# Altium PCB 采集卡.PcbDoc (part 1 of 2)
Units mil, origin at the board's own origin, x right, y up, seen from the top; angles counter-clockwise.
Board outline 5354.33 x 3248.82 mil, 2 copper layers (Top Layer, Bottom Layer); 147 components, 144 nets, 645 pads, 170 vias.
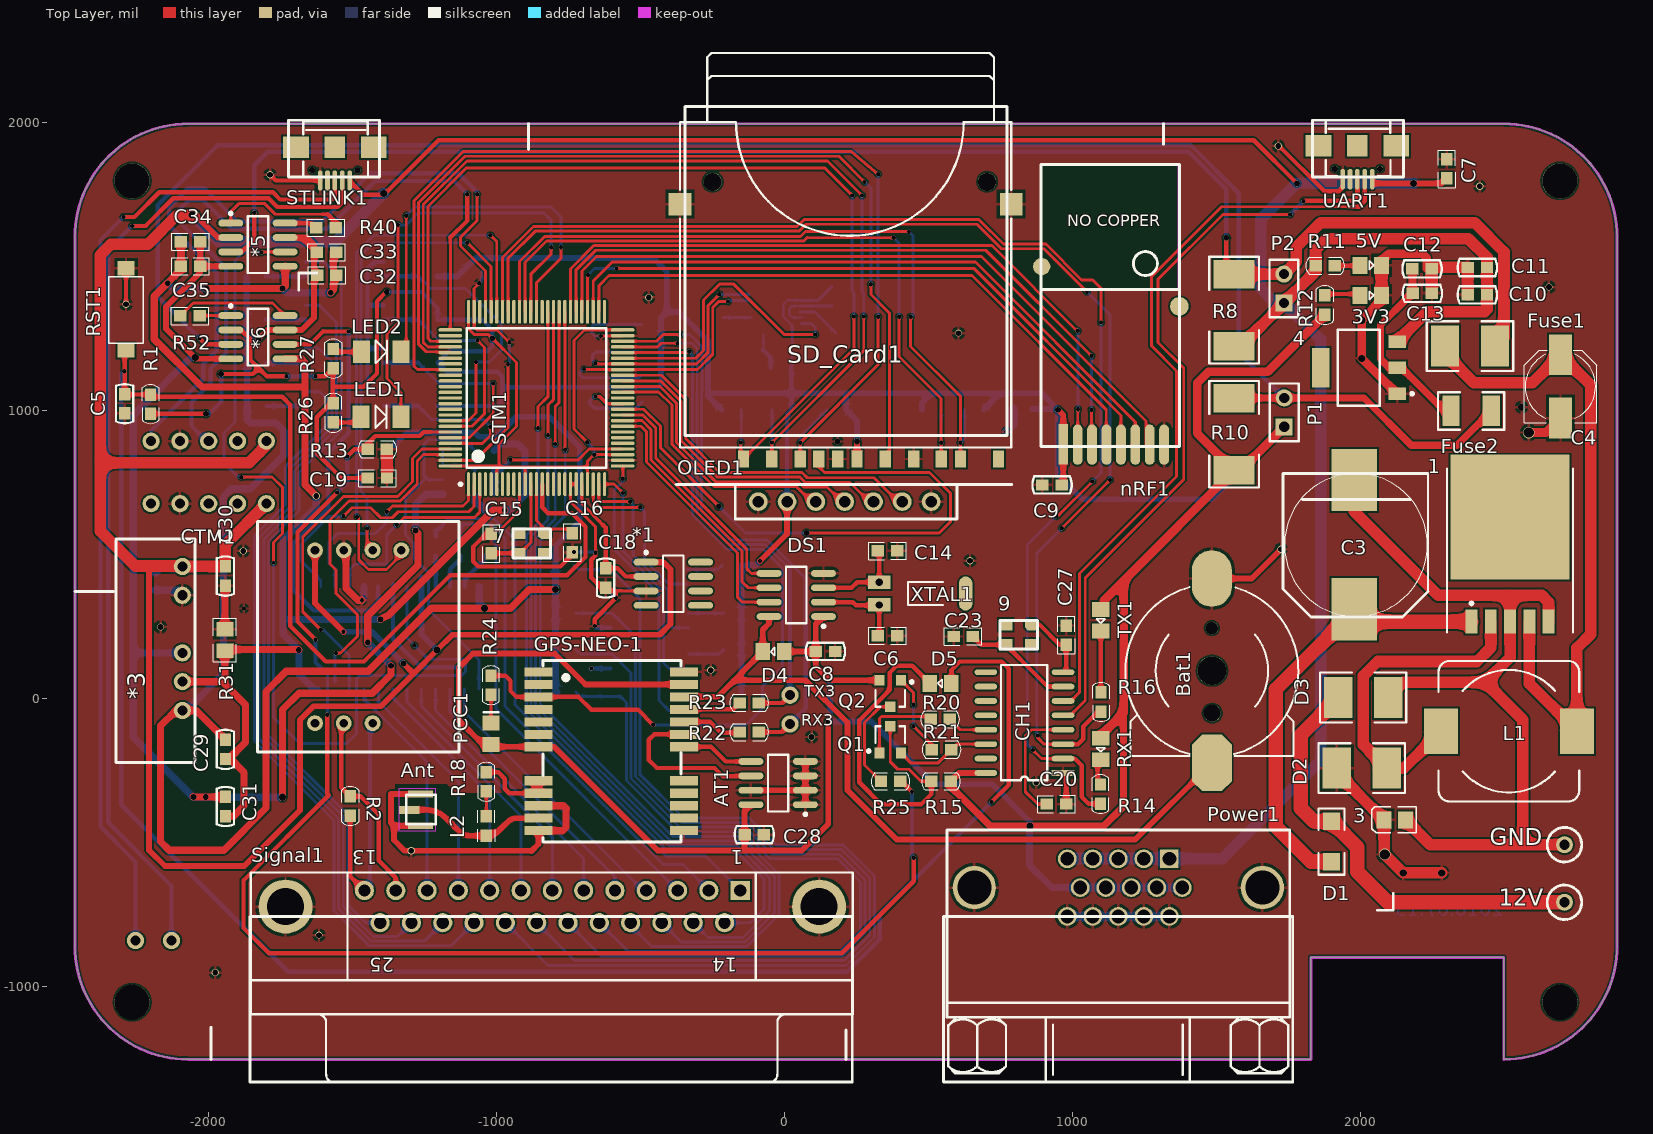
[diagram p0: Top Layer view]
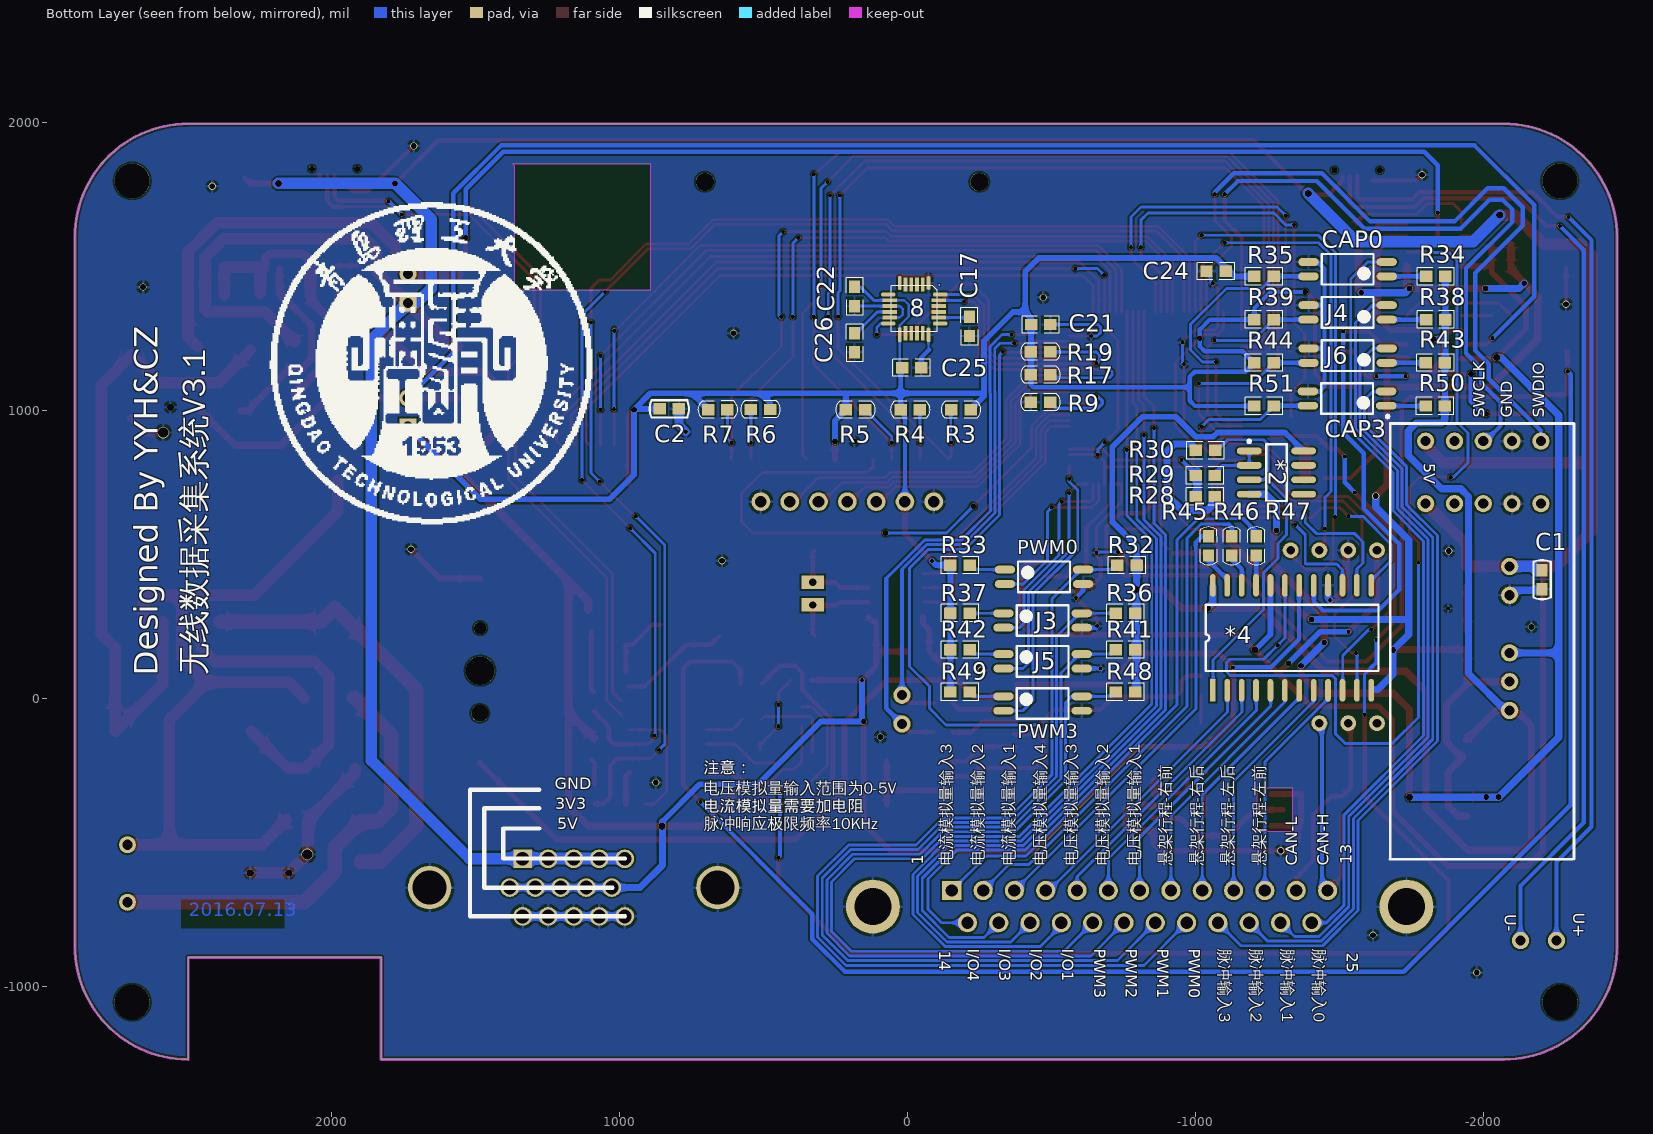
[diagram p1: Bottom Layer view, seen from below]

## Layer stack, top to bottom
Top Solder: solder mask 0.4, Solder Resist, Dk 3.5
Top Layer: signal copper 1.4
Dielectric1: dielectric 12.6, FR-4, Dk 4.8
Bottom Layer: signal copper 1.4
Bottom Solder: solder mask 0.4, Solder Resist, Dk 3.5

## Board outline
-2462.61,-860.95 ccw(c-2068.91,-860.95) -2068.91,-1254.65 1828.73,-1254.65 1828.73,-900.32 2498.02,-900.32 2498.02,-1254.65 ccw(c2498.02,-860.95) 2891.72,-860.95 2891.72,1600.47 ccw(c2498.02,1600.47) 2498.02,1994.17 -2068.91,1994.17 ccw(c-2068.91,1600.47) -2462.61,1600.47

## Design rules (kind name [scope] priority, off if disabled: settings)
Clearance [All] p1: gap=6
ComponentClearance [All] p1: gap=0 collisioncheckmode=3 verticalgap=0 showdistances=FALSE
MinimumSolderMaskSliver [All] p1: minsoldermaskwidth=7
PolygonConnect [All] p1: connectstyle=Relief reliefconductorwidth=10 reliefentries=4 polygonreliefangle="90 Angle" airgapwidth=10
RoutingVias [All] p1: holewidth=28 width=50 viastyle="Through Hole" minholewidth=28 minwidth=25 maxholewidth=28 maxwidth=50
SilkToSolderMaskClearance SilkscreenOverComponentPads [IsPad] p1: minsilkscreentomaskgap=10 clearancetoexposedcopper=TRUE
SolderMaskExpansion [All] p1: expansion=4
Width [All] p1: maxlimit=80 minlimit=8 preferedwidth=15
27 further rules are at their usual default settings.

## Components (designator, comment, footprint, x,y, rotation, side; value= is the part's Value field where it differs from the comment)
1 "LM2596S-5.0" TO-263-5 2520,432 r0 top
3 "0" 0805-3 2120,-423 r180 top
3V3 "LED0" 0805-2 2036.6,1398 r0 top (schematic designator 6)
4 "AMS1117" 1117-3.3 2000,1147 r90 top
5V "LED0" 0805-2 2036.6,1502.59 r0 top (schematic designator 5)
7 "XTAL-4pin" 3225-XTAL -811,487 r180 top
8 "MPU6050" QFN24 -102,1436 r270 bottom
9 "XTAL-4pin" 3225-XTAL 879,170 r180 top
12V "CHECK" CHECK-A 2709,-709 r0 top (schematic designator 2)
*1 "MC1403" SOIC8_N -435,407 r0 top
*2 "NE5532" SOIC8_N -1230,793 r180 bottom
*3 "A0505S" A0505S-2W -2275,457 r180 top
*4 "CD4067" SOP24 -1059,32 r90 bottom
*5 "AD623" SOIC8_N -1877,1584 r0 top
*6 "AD623" SOIC8_N -1877,1263 r0 top
Ant "IPX接头" IPX2.6 -1312,-438 r90 top (schematic designator Antenna1)
AT1 "AT24C02" SOIC8_N 29,-305 r180 top
Bat1 "Battery" CR1220 1485,95 r0 top
C1 "Cap" C-RAD-0603 -2202,411 r270 bottom
C2 "Cap" C-RAD-0603 828,1003.94 r180 bottom
C3 "680uF/35V" C-RB-S12 1985,532 r90 top
C4 "220uF/16V" C-RB-S6 2695,1082 r270 top
C5 "Cap" C-RAD-0603 -2290,1022 r270 top
C6 "6pf" CL-0603 392,217 r180 top
C7 "Cap" CL-0603 2300,1804 r90 top
C8 "Cap" C-RAD-0603 143,161.94 r180 top
C9 "Cap" C-RAD-0603 930,740 r0 top
C10 "Cap" C-RAD-0603 2406.54,1400 r0 top
C11 "Cap" C-RAD-0603 2406.54,1495 r0 top
C12 "Cap" C-RAD-0603 2214.54,1490 r180 top
C13 "Cap" C-RAD-0603 2215.54,1405 r0 top
C14 "6pf" CL-0603 392,511 r180 top
C15 "22pf" CL-0603 -1017,570 r270 top
C16 "22pf" CL-0603 -736,506 r90 top
C17 "Cap" CL-0603 -214,1324 r270 bottom
C18 "Cap" C-RAD-0603 -620,417 r90 top
C19 "104" CL-0603 -1379,764 r180 top
C20 "104" CL-0603 912,-368 r0 top
C21 "104" CL-0603 -495,1297 r0 bottom
C22 "Cap" CL-0603 185,1428 r270 bottom
C23 "Cap" CL-0603 655,214 r180 top
C24 "104" CL-0603 -1037,1482 r180 bottom
C25 "Cap" CL-0603 20,1147 r180 bottom
C26 "Cap" CL-0603 185,1267 r270 bottom
C27 "Cap" CL-0603 979,185 r90 top
C28 "Cap" C-RAD-0603 -104,-474 r0 top
C29 "Cap" C-RAD-0603 -1940,-178 r90 top
C30 "Cap" C-RAD-0603 -1940,423.54 r90 top
C31 "Cap" C-RAD-0603 -1940,-376.46 r270 top
C32 "Cap" 0603-1 -1588,1468 r180 top
C33 "Cap" 0603-1 -1589,1548 r180 top
C34 "Cap" 0603-1 -2061,1584 r0 top
C35 "Cap" 0603-1 -2061,1499 r0 top
CAP0 "TLP281" SOP127P710X350-4N -1527,1489 r0 bottom (schematic designator J2)
CAP3 "TLP281" SOP127P710X350-4N -1525,1040 r0 bottom (schematic designator J8)
CH1 "CH340G" SOP16 968,-260 r180 top
CTM1 "CTM8251" CTM8251 -1629,513 r270 top
D1 "1N4007" 1206 1900,-498 r270 top
D2 "1N5824" 1812 2005,-243 r0 top
D3 "双向TVS" 1812 2010,2 r180 top
D4 "1n4148" 0805-2 -37,161.53 r180 top
D5 "1n4148" 0805-2 543,51 r180 top
DS1 "DS1302" SOIC8_N 92,348 r180 top
Fuse1 "自恢复保险丝" 1812 2381,1222 r0 top
Fuse2 "自恢复保险丝" 1210 2385,997 r0 top
GND "CHECK" CHECK-A 2709,-509 r0 top (schematic designator GND1)
GPS-NEO-1 "NEO-6M" NEO-6M -838,-169 r90 top
J3 "TLP281" SOP127P710X350-4N -468,269.33 r180 bottom
J4 "TLP281" SOP127P710X350-4N -1527,1339 r0 bottom
J5 "TLP281" SOP127P710X350-4N -468,127.67 r180 bottom
J6 "TLP281" SOP127P710X350-4N -1527,1189 r0 bottom
L1 "Inductor" L-SMD-12 2516,-115 r0 top
L2 "Inductor" 0603电感 -1034,-444 r270 top
LED1 "LED0" DIODE-1206 -1468.8,977 r0 top
LED2 "LED0" DIODE-1206 -1467.8,1202 r0 top
nRF1 "nRF24l01贴片" NRF24L01贴片 1372,1853 r90 top
OLED1 "OLED-Freescale" OLED-FREESCALE 210,682 r0 top
P1 "Header 2" HDR2X1_A 1736,942 r90 top
P2 "Header 2" HDR2X1_A 1735,1372 r90 top
PCC1 "LED0" LED_0805 -1018,-124 r90 top
Power1 "Power" DB15-F 1160,-758 r270 top
PWM0 "TLP281" SOP127P710X350-4N -473,421 r180 bottom (schematic designator J1)
PWM3 "TLP281" SOP127P710X350-4N -468,-19 r180 bottom (schematic designator J7)
Q1 "SS8050" SOT-23 368,-144 r0 top
Q2 "SS8550" SOT-23 368,16 r180 top
R1 "Res2" 8-RL-0603 -2200,987 r90 top
R2 "Res2" 8-RL-0603 -1507,-341 r270 top
R3 "Res2" 8-RL-0603 -218,1001.5 r0 bottom
R4 "Res2" 8-RL-0603 25,1001 r180 bottom
R5 "Res2" 8-RL-0603 215,1001 r180 bottom
R6 "Res2" 8-RL-0603 478,1002 r0 bottom
R7 "Res2" 8-RL-0603 693,1001.5 r180 bottom
R8 "Res1" 2512 1562,1347 r270 top
R9 "10K" 8-RL-0603 -427.22,1027 r180 bottom
R10 "Res1" 2512 1562,916 r270 top
R11 "Res2" 8-RL-0603 1911.6,1501.06 r180 top
R12 "Res2" 8-RL-0603 1877,1398 r270 top
R13 "10K" 8-RL-0603 -1379.07,864 r180 top
R14 "472" 8-RL-0603 1098,-366.93 r90 top
R15 "10K" 8-RL-0603 578,-289 r180 top
R16 "472" 8-RL-0603 1100,-46.93 r90 top
R17 "10K" 8-RL-0603 -427.22,1122 r180 bottom
R18 "10" 8-RL-0603 -1034,-324 r90 top
R19 "10K" 8-RL-0603 -427.22,1202 r180 bottom
R20 "Res1" 8-RL-0603 508,-74 r0 top
R21 "Res1" 8-RL-0603 513,-179 r0 top
R22 "51R" 8-RL-0603 -155,-118 r0 top
R23 "51R" 8-RL-0603 -155,-17 r0 top
R24 "1K" 8-RL-0603 -1018,11 r90 top
R25 "Res1" 8-RL-0603 403,-289 r180 top
R26 "Res2" 8-RL-0603 -1565.8,957 r90 top
R27 "Res2" 8-RL-0603 -1565.8,1212 r270 top
R28 "0.1%" 0603-1 -1032.54,700 r180 bottom
R29 "0.1%" 0603-1 -1032.54,773 r0 bottom
R30 "Res1" 0603-1 -1033.54,860 r180 bottom
R31 "Res1" 0805-1 -1941.97,202 r270 top
R32 "Res1" 0603-1 -761,461.28 r0 bottom
R33 "Res1" 0603-1 -181.54,461.28 r180 bottom
R34 "Res1" 0603-1 -1833,1464 r0 bottom
R35 "Res1" 0603-1 -1237,1464 r180 bottom
R36 "Res1" 0603-1 -756,295 r0 bottom
R37 "Res1" 0603-1 -181.54,295 r180 bottom
R38 "Res1" 0603-1 -1833,1314 r0 bottom
R39 "Res1" 0603-1 -1237,1314 r180 bottom
R40 "Res1" 0603-1 -1591,1633 r180 top
R41 "Res1" 0603-1 -756,167.94 r0 bottom
R42 "Res1" 0603-1 -181.54,167.94 r180 bottom
R43 "Res1" 0603-1 -1831.54,1164 r0 bottom
R44 "Res1" 0603-1 -1237,1164 r180 bottom
R45 "Res1" 8-RL-0603 -1044,562 r270 bottom
R46 "Res1" 8-RL-0603 -1125,562 r270 bottom
R47 "Res1" 8-RL-0603 -1210,562 r270 bottom
R48 "Res1" 0603-1 -756,21.28 r0 bottom
R49 "Res1" 0603-1 -181.54,21.28 r180 bottom
R50 "Res1" 0603-1 -1831,1014 r0 bottom
R51 "Res1" 0603-1 -1237,1014 r180 bottom
R52 "Res1" 0603-1 -2063,1327 r180 top
RST1 "复位" 6X3MM微动 -2285,1492 r270 top
RX1 "LED0" 0805-2 1099,-176.93 r270 top
SD_Card1 "SDCARD" SDCARD_B 228,865 r90 top
Signal1 "信号" DSUB1.385-2H25A -805,-1098 r180 top
STLINK1 "USB_M" USB_MICRO -1460,1862 r180 top
STM1 "STM32F103VBT6" LQFP100_M -860,1042 r90 top
TX1 "LED0" 0805-2 1099,270 r270 top
UART1 "USB_M" USB_MICRO 2090,1867 r180 top
XTAL1 "32.768K" X-TC15 330,363 r90 top
? "Comment" QTU30mm 1320,1440 r180 top

## Footprints (in the part's own frame and the unit in brackets; to place one, negate y for a bottom-side part, rotate by r counter-clockwise, add the part's x,y. Pads: shape width x height; smd on the part's side, far side on the other; paste and mask are expansions set on the pad)
6X3MM微动 [mil]
  rect 50x60 smd: 1(0,0) 2(285,0)
  silkscreen extent 30,-60 260,60
8-RL-0603 [mm]
  rect 1.1x1 smd: 1(0,0) 2(1.7,0)
  silkscreen extent -0.86,-0.75 2.56,0.76
0603-1 [mm] "贴片带丝印"
  rect 1.1x1 smd: 1(-0.85,0) 2(0.85,0)
  silkscreen extent -1.65,-0.76 1.65,0.76, body extent -1.14,-0.38 1.14,0.38, height 1
0603电感 [mm]
  rect 1.1x1 smd: 1(-0.839,0) 2(0.861,0)
  silkscreen extent -1.39,-0.75 1.41,0.76, body extent -1.4,-0.51 1.4,0.51, height 1.02
0805-1 [mm] "贴片带丝印"
  rect 1.3x1.5 smd: 1(-0.95,0) 2(0.95,0)
  silkscreen extent -1.91,-1.02 1.91,1.02, body extent -1.14,-0.51 1.14,0.51, height 1
0805-2 [mm] "贴片无丝印"
  rect 1.3x1.5 smd: 1(-0.95,0) 2(0.95,0)
  silkscreen extent -0.13,-0.38 0.25,0.38, body extent -1.65,-0.76 1.65,0.76, height 1.02
0805-3 [mm] "贴片无丝印"
  rect 1.3x1.5 smd: 1(-0.95,0) 2(0.95,0)
  silkscreen extent -1.91,-1.14 2.03,1.14, body extent -1.65,-0.76 1.65,0.76, height 1.02
1117-3.3 [mm]
  rect 1.1x1.55 smd: 1(-2.3,-3.248) 2(0,-3.248) 3(2.3,-3.248)
  rect 3.45x1.55 smd: 4(0,3.502)
  silkscreen extent -3.35,-4.7 3.35,1.98, body extent -3.3,-1.65 3.3,1.91, height 1.8
1206 [mil] "贴片元件"
  rect 60x60 smd: 1(-70,0) 2(70,0)
  silkscreen extent -115,-45 115,45, body extent -75,-35 75,35, height 39
1210 [mil] "贴片元件"
  rect 60x106.3 smd: 1(-70,0) 2(70,0)
  silkscreen extent -115,-65 115,65, body extent -65,-50 65,50, height 39
1812 [mm] "保险丝"
  rect 2.5x3.6 smd: 1(-2.2,0) 2(2.2,0)
  silkscreen extent -3.81,-2.2 3.81,2.2, body extent -2.54,-1.65 2.67,1.65, height 1.2
2512 [mm] "保险丝"
  rect 2.5x3.6 smd: 1(-3.175,0) 2(3.175,0)
  silkscreen extent -4.7,-2.2 4.7,2.2, body extent -3.18,-1.65 3.18,1.65, height 1.2
3225-XTAL [mil]
  oct 47.24x39.37 smd: 1(20,-85)
  rect 47.24x39.37 smd: 2(110,-85) 3(110,-15) 4(20,-15)
  silkscreen extent 0,-100 130,0, body extent 0,-100 130,0, height 79
A0505S-2W [mil] "2W和1W的区别在于宽度多了1mm"
  round 60 hole 35: 1(-185.43,0) 2(-185.43,100) 4(-185.43,300) 5(-185.43,400) 6(-185.43,500)
  silkscreen extent -230,-95 45,680, body extent -230,-95 45,680, height 394
C-RAD-0603 [mm] "贴片电容"
  rect 1.1x1 smd: 1(-0.85,0) 2(0.85,0)
  silkscreen extent -1.73,-0.76 1.73,0.76, body extent -1.14,-0.38 1.14,0.38, height 1
C-RB-S6 [mm] "贴片电解"
  rect 3.6x2 smd: 1(-2.794,0) 2(2.794,0)
  silkscreen extent -3.2,-3.2 3.2,3.2, body extent -3.15,-3.12 3.15,3.17, height 7.7
C-RB-S12 [mm]
  rect 5.5x4 smd: 1(-5.69,0.152) 2(5.715,0.152)
  silkscreen extent -6.35,-6.35 6.3,6.43, body extent -6.32,-6.32 6.27,6.27, height 13
CHECK-A [mm] "Connector; Plug"
  round 1.5 hole 0.9: 1(0,0)
  silkscreen extent -1.52,-1.52 1.52,1.52
CL-0603 [mm]
  rect 1.1x1 smd: 1(0,0) 2(1.7,0)
  silkscreen extent -0.8,-0.75 2.5,0.76
CR1220 [mm] "钮扣电池"
  round 2.54 hole 2.54: 0(0,0)
  round 1.1 hole 1.1: 0(0,3.75)
  round 1.5 hole 1.5: 0(0.025,-3.75)
  oct 3.5x5 smd: 1(0,-8.128)
  oval 3.5x5 smd: 2(0,8.128)
  silkscreen extent -7.62,-7.5 7.62,7.36, body extent -6.99,-7 7,7, height 4
CTM8251 [mil]
  round 55 hole 30: 1(0,0) 2(0,100) 3(0,200) 4(0,300) 6(600,200) 7(600,100) 8(600,0)
  silkscreen extent -100,-200 700,500, body extent -100,-200 700,500, height 280
DB15-F [mil] "VGAĸ"
  rect 65x65 hole 48: 1(-200,177.16)
  round 65 hole 48: 2(-200,88.58) 3(-200,0) 4(-200,-88.58) 5(-200,-177.16) 6(-100,222.17) 7(-100,133.58) 8(-100,45) 9(-100,-43.58) 10(-100,-132.16) 11(0,177.16) 12(0,88.58) 13(0,0) 14(0,-88.58) 15(0,-177.16)
  round 150 hole 118.11: 16(-100,500) 17(-100,-500)
  silkscreen extent -300,-595 575,596, body extent -300,-595 350,595, height 494
DIODE-1206 [mm] "玻璃封装二极管"
  rect 1.5x2 smd: 1(0,0) 2(3.5,0)
  silkscreen extent 1.25,-1 2.25,1
DSUB1.385-2H25A [mm] "Connector; D Subminiature; 25 Position; Right Angle; Pitch 1.385 mm"
  rect 1.69x1.69 hole 1.09: 1(-16.566,-10.92)
  round 1.69 hole 1.09: 2(-13.805,-10.92) 3(-11.044,-10.92) 4(-8.283,-10.92) 5(-5.522,-10.92) 6(-2.761,-10.92) 7(0,-10.92) 8(2.761,-10.92) 9(5.522,-10.92) 10(8.283,-10.92) 11(11.044,-10.92) 12(13.805,-10.92) 13(16.566,-10.92) 14(-15.185,-8.08) 15(-12.424,-8.08) 16(-9.663,-8.08) 17(-6.902,-8.08) 18(-4.141,-8.08) 19(-1.38,-8.08) 20(1.381,-8.08) 21(4.142,-8.08) 22(6.903,-8.08) 23(9.664,-8.08) 24(12.425,-8.08) 25(15.186,-8.08)
  round 4.76 hole 3.26: 26(-23.526,-9.5) 27(23.526,-9.5)
  silkscreen extent -26.5,-12.5 26.6,6
HDR2X1_A [mm] "Connector; Header; 2 Position"
  rect 1.5x1.5 hole 0.9: 1(0,0)
  round 1.5 hole 0.9: 2(2.54,0)
  silkscreen extent -1.27,-1.27 3.81,1.27
IPX2.6 [mm]
  rect 0.7x1.8 smd: 1(1.27,-0.254)
  rect 0.6x2.2 smd: 2(-0.127,-1.27) 3(2.667,-1.27)
  Keep-Out Layer pour cut-out: -0.635,0.635 3.175,0.635 3.175,-2.54 -0.635,-2.54
  silkscreen extent 0,-2.6 2.6,0, body extent -0.03,-2.57 2.57,0.03, height 1.25
L-SMD-12 [mm] "贴片电感12*12"
  rect 3x4 smd: 1(-6,0) 2(6,0)
  silkscreen extent -6.2,-6.2 6.2,6.2, body extent -6.21,-6.23 6.21,6.18, height 2.5
LED_0805 [mm] "贴片二极管"
  rect 1.3x1.5 smd: 1(-0.95,0) 2(0.95,0)
  silkscreen extent 1.91,-0.63 1.91,0.64, body extent -1.65,-0.76 1.65,0.76, height 1.02
LQFP100_M [mm]
  oval 2.1x0.3 smd: 1(-7.6,6) 2(-7.6,5.5) 3(-7.6,5) 4(-7.6,4.5) 5(-7.6,4) 6(-7.6,3.5) 7(-7.6,3) 8(-7.6,2.5) 9(-7.6,2) 10(-7.6,1.5) 11(-7.6,1) 12(-7.6,0.5) 13(-7.6,0) 14(-7.6,-0.5) 15(-7.6,-1) 16(-7.6,-1.5) 17(-7.6,-2) 18(-7.6,-2.5) 19(-7.6,-3) 20(-7.6,-3.5) 21(-7.6,-4) 22(-7.6,-4.5) 23(-7.6,-5) 24(-7.6,-5.5) 25(-7.6,-6) 51(7.6,-6) 52(7.6,-5.5) 53(7.6,-5) 54(7.6,-4.5) 55(7.6,-4) 56(7.6,-3.5) 57(7.6,-3) 58(7.6,-2.5) 59(7.6,-2) 60(7.6,-1.5) 61(7.6,-1) 62(7.6,-0.5) 63(7.6,0) 64(7.6,0.5) 65(7.6,1) 66(7.6,1.5) 67(7.6,2) 68(7.6,2.5) 69(7.6,3) 70(7.6,3.5) 71(7.6,4) 72(7.6,4.5) 73(7.6,5) 74(7.6,5.5) 75(7.6,6)
  oval 0.3x2.1 smd: 26(-6,-7.6) 27(-5.5,-7.6) 28(-5,-7.6) 29(-4.5,-7.6) 30(-4,-7.6) 31(-3.5,-7.6) 32(-3,-7.6) 33(-2.5,-7.6) 34(-2,-7.6) 35(-1.5,-7.6) 36(-1,-7.6) 37(-0.5,-7.6) 38(0,-7.6) 39(0.5,-7.6) 40(1,-7.6) 41(1.5,-7.6) 42(2,-7.6) 43(2.5,-7.6) 44(3,-7.6) 45(3.5,-7.6) 46(4,-7.6) 47(4.5,-7.6) 48(5,-7.6) 49(5.5,-7.6) 50(6,-7.6) 76(6,7.6) 77(5.5,7.6) 78(5,7.6) 79(4.5,7.6) 80(4,7.6) 81(3.5,7.6) 82(3,7.6) 83(2.5,7.6) 84(2,7.6) 85(1.5,7.6) 86(1,7.6) 87(0.5,7.6) 88(0,7.6) 89(-0.5,7.6) 90(-1,7.6) 91(-1.5,7.6) 92(-2,7.6) 93(-2.5,7.6) 94(-3,7.6) 95(-3.5,7.6) 96(-4,7.6) 97(-4.5,7.6) 98(-5,7.6) 99(-5.5,7.6) 100(-6,7.6)
  silkscreen extent -7.72,-6.15 6.15,6.82
NEO-6M [mm]
  rect 0.8x2.5 smd: 1(6.6,0.381) 2(5.5,0.381) 3(4.4,0.381) 4(3.3,0.381) 5(2.2,0.381) 6(1.1,0.381) 7(0,0.381) 8(-3,0.381) 9(-4.1,0.381) 10(-5.2,0.381) 11(-6.3,0.381) 12(-7.4,0.381) 13(-7.4,-12.446) 14(-6.3,-12.446) 15(-5.2,-12.446) 16(-4.1,-12.446) 17(-3,-12.446) 18(0,-12.446) 19(1.1,-12.446) 20(2.2,-12.446) 21(3.3,-12.446) 22(4.4,-12.446) 23(5.5,-12.446) 24(6.6,-12.446)
  silkscreen extent -8.4,-12.19 7.6,0.01, body extent -8.38,-12.19 7.62,0, height 2.2
NRF24L01贴片 [mil] "贴片，双天线"
  rect 140x34 smd: 1(-971.82,403.23)
  oval 140x34 smd: 2(-973,353) 3(-973,303) 4(-973,253) 5(-973,203) 6(-973,153) 7(-973,103) 8(-973,53)
  round 60 smd: 10(-355,478)
  round 65 smd: 11(-493,0)
  Keep-Out Layer pour cut-out: -435,480 0,480 0,0 -5,5 -435,5
  silkscreen extent -980,0 0,480, body extent -980,0 0,480, height 87
OLED-FREESCALE [mil]
  round 65 hole 40: 1(-300,0) 2(-200,0) 3(-100,0) 4(0,0) 5(100,0) 6(200,0) 7(300,0)
  silkscreen extent -585,-60 580,60
QFN24 [mil]
  oct 50x13 smd: 1(-5,-30)
  rect 50x13.39 smd: 2(0,-50) 3(0,-70) 4(0,-90) 5(0,-110) 14(170,-110) 15(170,-90) 16(170,-70) 17(170,-50)
  oct 50x13.39 smd: 6(-5,-130) 13(175,-130) 18(175,-30)
  oct 13.39x50 smd: 7(35,-170) 12(135,-170) 19(135,10)
  rect 13.39x50 smd: 8(55,-165) 9(75,-165) 10(95,-165) 11(115,-165) 20(115,5) 21(95,5) 22(75,5) 23(55,5)
  oct 13x50 smd: 24(35,10)
  silkscreen extent 5,-160 165,0, body extent 5,-160 165,0, height 71
QTU30mm [mil]
SDCARD_B [mm] "SD卡自弹"
  rect 1.5x1 smd: 1(-0.889,6.88) 2(-0.889,4.38) 3(-0.889,1.08) 4(-0.889,-0.63) 5(-0.889,-3.13) 6(-0.889,-5.63) 7(-0.889,-8.05) 8(-0.889,-9.75) 9(-0.889,9.38) 10(-0.889,2.73) 11(-0.889,-13.1)
  rect 2x2 smd: 12(21.59,-14.224) 13(21.59,14.986)
  round 1.6 hole 1.6: ""(23.55,-12.1) ""(23.55,12.1)
  silkscreen extent 0.13,-14.22 34.92,14.99, body extent 0.13,-14.22 28.91,15.04, height 2.7
SOIC8_N [mm] "8-Pin Small Outline Integrated Circuit Package (SOIC8), IPC Medium Density"
  oval 2.2x0.6 smd: 1(-1.13,1.651) 2(-1.13,0.381) 3(-1.13,-0.889) 4(-1.13,-2.159) 5(3.67,-2.159) 6(3.67,-0.889) 7(3.67,0.381) 8(3.67,1.651)
  silkscreen extent -1.25,-2.75 2.17,2.63, body extent -0.68,-2.7 3.22,2.2, height 1.75
SOP16 [mm]
  rect 2x0.5 smd: 1(0,0)
  oval 2x0.5 smd: 2(0,-1.27) 3(0,-2.54) 4(0,-3.81) 5(0,-5.08) 6(0,-6.35) 7(0,-7.62) 8(0,-8.89) 9(6.8,-8.89) 10(6.8,-7.62) 11(6.8,-6.35) 12(6.8,-5.08) 13(6.8,-3.81) 14(6.8,-2.54) 15(6.8,-1.27) 16(6.8,0)
  silkscreen extent 1.4,-9.53 5.46,0.64, body extent 0,-9.53 6.86,0.76, height 1.75
SOP24 [mm]
  rect 2x0.5 smd: 1(-0.127,0)
  oval 2x0.5 smd: 2(-0.127,-1.27) 3(-0.127,-2.54) 4(-0.127,-3.81) 5(-0.127,-5.08) 6(-0.127,-6.35) 7(-0.127,-7.62) 8(-0.127,-8.89) 9(-0.127,-10.16) 10(-0.127,-11.43) 11(-0.127,-12.7) 12(-0.127,-13.97) 13(9.127,-13.97) 14(9.127,-12.7) 15(9.127,-11.43) 16(9.127,-10.16) 17(9.127,-8.89) 18(9.127,-7.62) 19(9.127,-6.35) 20(9.127,-5.08) 21(9.127,-3.81) 22(9.127,-2.54) 23(9.127,-1.27) 24(9.127,0)
  silkscreen extent 1.58,-14.6 7.42,0.63, body extent 1.52,-14.6 7.49,0.63, height 2.6
SOP127P710X350-4N [mm] "SOP, 4-Leads, Body 2.7x4.5mm (max), Pitch 1.27mm, IPC Medium Density"
  oval 1.8x0.7 smd: 1(-3.448,0.635) 2(-3.448,-0.635) 3(3.448,-0.635) 4(3.448,0.635)
  silkscreen extent -2.29,-1.35 2.29,1.35, body extent -2.76,-1.35 2.79,1.35, height 3.5
SOT-23 [mm]
  rect 0.9x0.95 smd: 1(-0.95,-1.175) 2(0.95,-1.175) 3(0,1.175)
  silkscreen extent -2.03,-1.14 1.3,1.18
TO-263-5 [mm] "贴片LM2596"
  rect 1.05x2.1 smd: 1(-3.4,-4.225) 2(-1.7,-4.225) 3(0,-4.225) 4(1.7,-4.225) 5(3.4,-4.225)
  rect 10.5x11 smd: 6(0,4.987)
  silkscreen extent -5.55,-5.18 5.55,9.28, body extent -5.33,-4.7 5.33,10.29, height 3
USB_MICRO [mm] "USB方孔"
  oct 0.4x1.8 smd: 1(1.24,1.651) 2(1.89,1.651) 3(2.54,1.651) 4(3.19,1.651) 5(3.84,1.651)
  rect 2.286x1.9 smd: 6(5.969,-1.27) 7(-0.889,-1.27)
  rect 1.8x1.9 smd: 8(2.54,-1.27)
  round 0.54 hole 0.54: ""(0.54,0.753) ""(4.54,0.753)
  silkscreen extent -0.38,-3.56 5.33,1.4, body extent -0.43,-3.61 5.38,1.47, height 1.85
X-TC15 [mm] "圆柱晶振1"
  rect 1.2x2 hole 0.635: 1(-1,0) 2(1,0)
  oval 3x1.2 smd: 3(0,-7.62)
  silkscreen extent -1.02,-5.59 1.02,-2.54, body extent -1,-8.29 1,0, height 1.99

## Part data
1: "5V稳压芯片"
3 R15: library part Res1, "Resistor"
3V3 5V LED1 LED2 PCC1 RX1 TX1: "Typical INFRARED GaAs LED"
12V GND: "测试点"
*1: "2.5V基准电压"
*5 *6: "仪用放大器"
AT1: "EEROM存储器"
Bat1: "备份电池"
C1 C2 C8 C9 C18 C23 C27 C28 C29 C30 C31 C32 C33 C34 C35: "无极性电容"
C3 C4: library part "Cap Pol", "极性电解电容"
C5 C7 C10 C11 C12 C13 C17 C22 C25 C26: "Capacitor"
C6 C14 C15 C16 C19 C21 C24: library part CAP, "Capacitor"
C20: library part CAP
CAP0 CAP3 J3 J4 J5 J6 PWM0 PWM3: "光耦"
CTM1: "隔离CAN收发器"
D1: library part "Diode 1N4007", "1 Amp General Purpose Rectifier"
D2: library part "D Schottky", "Schottky Diode"
D3: library part TVS, "TVS保护"
D4 D5: library part Diode, "二极管"
Fuse1 Fuse2: library part "Fuse 2", "保险丝"
P1 P2: "接插件"
Power1: library part "D Connector 15", "VGA"
Q1: "NPN贴片三极管"
Q2: "PNP贴片三极管"
R1 R2 R3 R4 R5 R6 R7 R11 R12 R20 R21 R25 R26 R27: "Resistor"
R8 R10 R30 R31 R32 R33 R34 R35 R36 R37 R38 R39 R40 R41 R42 R43 R44 R45 R46 R47 R48 R49 R50 R51 R52: "贴片电阻"
R9 R13 R14 R16 R17 R18 R19 R22 R23 R24: library part RES
R28 R29: library part Res1, "贴片电阻"
RST1: library part SW-PB, "Switch"
SD_Card1: "SD卡自弹"
Signal1: library part "D Connector 25", "Receptacle Assembly, 25 Position, Right Angle"
STLINK1 UART1: "MicroUSB接口"
STM1: "STM32 ARM-based 32-bit MCU with 64 Kbytes Flash, 100-pin LQFP, Industrial Temperature"
XTAL1: library part 晶振

## Free pads (board coordinates)
  round 60 hole 35: 0(20,10) 1(-1798,892) 1(20,-90) 2(-1898,892) 3(-1998,892) 4(-2098,892) 5(-2198,892) 6(-2252,-842) 6(-1798,675) 7(-2127,-842) 7(-1898,675) 8(-1998,675) 9(-2098,675) 10(-2198,675)
  round 122.05 hole 122.05: ""(-2263.76,-1055.82) ""(-2263.76,1795.36) ""(2692.89,-1055.82) ""(2692.89,1795.36)

## Via types
v1: diameter 15, hole 15, Top Layer to Bottom Layer, 109 vias
v2: diameter 20, hole 20, Top Layer to Bottom Layer, 26 vias
v3: diameter 25, hole 20, Top Layer to Bottom Layer, 18 vias
v4: diameter 25, hole 25, Top Layer to Bottom Layer, 14 vias
v5: diameter 40, hole 35, Top Layer to Bottom Layer, 2 vias
v6: diameter 13, hole 13, Top Layer to Bottom Layer, 1 vias

## Nets (pads, with @x,y where several pads share a name; then routed paths per layer and width w, separated by ;. In a path a pad name is that pad's centre, name@x,y a point inside that pad or via, vN(x,y) a via of type N, cw(c..) or ccw(c..) an arc to the next point about the centre after c; other vN are vias at no path point)
2.5V: *1.2 C18.2 STM1.21 | length 478.8
  Top Layer w10: STM1.21@-702.52,742.79 -702.52,674.52 -630,602
  Top Layer w15: -630,602 -620,592 C18.2@-620,450.46 -578.46,450.46 -550,422 *1.2@-479.49,422
3V3: 8.8 8.13 *4.18 *6.2 AT1.8 C2.1 C8.2 C9.2 C19.2 C21.2 C22.1 C24.2 C25.1 C28.1 CH1.16 D4.1 DS1.1 GPS-NEO-1.7 GPS-NEO-1.23 nRF1.1 OLED1.2 P1.1 PCC1.1 Power1.6 Power1.7 Power1.8 Power1.9 Power1.10 Q2.2 R1.1 R3.1 R4.1 R5.1 R6.1 R7.1 R10.2 R12.2 R15.1 R17.1 R19.1 R26.2 R27.2 R33.1 R35.1 R37.1 R39.1 R42.1 R44.1 R49.1 R51.1 RX1.1 SD_Card1.4 STM1.6 STM1.11 STM1.22 STM1.28 STM1.50 STM1.75 STM1.100 TX1.1 | length 21648.2
  Top Layer w10: STM1.100@-1159.21,805.78 -992.78,805.78 -990,803 ; STM1.75@-1096.22,1341.21 -1096.22,1282.22 -1076,1262 -1027,1262 v2(-1014,1249) ; v2@-1013.5,1249.5 -929,1165 -929,943 -990,882 -990,803 ; STM1.6@-997.8,742.79 -997.8,795.2 -990,803 ; STM1.11@-899.37,742.79 -899.37,802.63 -899,803 ; v1(-684,888) -730,934 -730,1242 -693.78,1278.22 STM1.50@-560.79,1278.22 ; STM1.22@-682.83,742.79 -682.83,803 ; STM1.28@-560.79,845.15 v1(-659.85,845.15) -682.83,822.17 -682.83,803 ; -990,803 -899,803 ; -899,803 -682.83,803
  Top Layer w15: R1.1@-2200,987 v2(-2007,987) ; v2(-1955,1125) -1845,1125 -1824.5,1145.5 ; *6.2@-1921.49,1278 -1885,1278 -1853,1246 -1853,1174 -1824.5,1145.5 ; v1(-1728,1117) -1796,1117 -1824.5,1145.5 ; v1(-1627,1117) -1594,1117 -1575.93,1135.07 -1567,1135.07 -1567,1030.72 -1623,974.72 -1623,850 -1537,764 C19.2@-1445.93,764 ; -1565,1081 -1460,1081 -1414,1127 -1414,1378 -1382,1410 v2(-1380,1410)
  Top Layer w20: GPS-NEO-1.23@-378,47.53 -690,47.53 -797.47,155 -1080,155 -1130,105 -1130,-77 -1045.6,-161.4 -1030,-161.4 -1022.4,-169 -799,-169 -439,-529 -136,-529 ; AT1.8@-115.49,-370 -137.46,-391.98 C28.1@-137.46,-474 -137.46,-527.54 -136,-529 ; v1(-84,476) 10,570 OLED1.2@10,667 ; D4.1@0.4,161.53 109.13,161.53 109.13,111.87 v1(158.74,62.26) Q2.2@330.6,62.26 ; C8.2@109.54,161.94 109.54,256.05 DS1.1@136.49,283 ; v2(153,-81) 153,-437 61,-529 -136,-529 ; SD_Card1.4@252.8,830 v2(252.8,891) ; R15.1@578,-307 R15.1@578,-289 607,-260 CH1.16@700.28,-260 ; v2(951,1001) 968.77,983.23 nRF1.1@968.77,881.18 C9.2@968.77,745.31
  Top Layer w25: R15.1@578,-307 716,-445 1109,-445 1178.5,-375.5 1178.5,-50.55
  Top Layer w30: RX1.1@1089.53,-139.53 1178.5,-50.55 1178.5,407.5 ; TX1.1@1109,307.4 1109,338 1178.5,407.5 ; P1.1@1736,942 1585,791 R10.2@1562,791 ; R12.2@1877,1331.07 1678.93,1133 1473,1133 1434,1094 1434,919 R10.2@1562,791 ; 1178.5,407.5 R10.2@1562,791
  Bottom Layer w8: C25.1@20,1147 25,1152 28,1155 8.13@28,1261 28,1294 -3,1325 -3,1366 12,1381 8.8@63,1381
  Bottom Layer w10: v1(-684,888) -659.85,863.85 v1(-659.85,845.15) ; 8.8@55,1381 118,1381 165,1428
  Bottom Layer w15: v2(-2007,987) -1996,987 -1955,1028 v2(-1955,1125) ; v1(-1728,1117) v1(-1627,1117) ; v2(-1380,1410) -1259,1410 -1203.54,1354.54 R39.1@-1203.54,1314 -1048,1314 -1014,1280 v2(-1014,1249) -1014,1221 -1031,1204 -1163.54,1204 R44.1@-1203.54,1164 -1172.54,1133 -996,1133 -979,1116 -979,1032 -997,1014 R51.1@-1203.54,1014 ; *4.18@-1358,395 -1358,204 -1261,107 v1@-1128,107 ; -979,1079 -436,1079 -427.22,1087.78 R17.1@-427.22,1122 ; OLED1.2@10,667 10,986 R4.1@25,1001 25,1058 C25.1@25,1152
  Bottom Layer w20: R35.1@-1203.54,1464 -1134.93,1464 -1070.93,1528 -455,1528 -408,1481 -408,1340 ; R17.1@-427.22,1122 -428.07,1122.85 C21.2@-428.07,1297 -428.07,1319.93 -408,1340 ; -265,1048.5 -265,1240 -365,1340 -408,1340 ; R3.1@-218,1001.5 -265.75,1049.25 -257,1058 25,1058 216,1058 ; R49.1@-148.07,21.28 R42.1@-148.07,167.94 R37.1@-148.07,295 R33.1@-148.07,461.28 -98.72,461.28 v1(-84,476) ; v1(158.74,62.26) 158.74,-75.26 v2(153,-81) 302,-81 520,-299 723,-299 852,-428 ; v2(252.8,891) 252.8,963.2 R5.1@215,1001 215,1057 216,1058 ; R6.1@478,1002 478,1025 511,1058 ; R7.1@693,1001.5 749.5,1058 ; C2.1@861.46,1003.94 v2@948.06,1003.94 ; P1.1@1736,942 1484,690 1036,690 951,775 v2(951,1001) v2@948.06,1003.94 ; 216,1058 511,1058 ; 511,1058 749.5,1058 ; 749.5,1058 894,1058 v2@948.06,1003.94
  Bottom Layer w25: 852,-428 852,-580 930,-658 Power1.10@1027.84,-658 Power1.9@1116.42,-658 Power1.8@1205,-658 Power1.7@1293.58,-658 Power1.6@1382.17,-658
  other v1: -1128,106
  other v4: 853,-445
3V3_OUT: 4.2 C12.2 C13.1 Fuse2.1 | length 656.8
  Top Layer w25: C13.1@2165.07,1390.07 2070,1295 2070,1178 2101,1147 4.2@2127.87,1147 2143,1147 2293,997 Fuse2.1@2315,997 ; C12.2@2181.07,1490 2181.07,1406 C13.1@2182.07,1405
5V: 4.3 *1.1 *3.1 *4.20 *5.2 C1.1 C7.1 C10.2 C11.2 C30.2 CTM1.1 P2.1 pad.1@-1798,892 pad.6@-1798,675 Power1.1 Power1.2 Power1.3 Power1.4 Power1.5 R8.2 R11.2 STLINK1.1 UART1.1 | length 17275.2
  Top Layer w15: STLINK1.1@-1508.82,1812 -1508.82,1795.82 -1460,1747 -1390,1747 -1200,1937 1630,1937 v2(1780,1787) ; UART1.1@2041.18,1817 2041.18,1793.82 UART1.1@2048,1787
  Top Layer w20: -2202,458.54 -2205,455.54 -2205,-528 -2150,-583 -1875,-583 -1681.5,-389.5 -1681.5,-75.5 -1634,-28 -1400,-28 -1284,88 ; v4@-2045,1677 -1967,1599 *5.2@-1921.49,1599 ; CTM1.1@-1629,513 -1629,329 v1(-1530,230) v1@-1529,229 ; v2(-1322,120) -1290,88 -1284,88 ; *1.1@-479.49,472 -420,472 -395,447 -395,257 -432,220 -1152,220 v4(-1205,167) -1284,88 ; UART1.1@2048,1787 2283,1787 C7.1@2300,1804
  Top Layer w30: v4(-2055,1677) v4@-2045,1677
  Top Layer w40: v4(-2055,1677) -2108,1677 -2210,1575 -2338,1575 -2375,1538 -2375,817 ; pad.6@-1798,675 -1940,533 C30.2@-1940,457 *3.1@-2089.57,457 -2088.03,458.54 -2202,458.54 -2253.54,458.54 -2375,580 -2375,817 ; pad.1@-1798,877 -1858,817 -2375,817 ; R8.2@1562,1222 1585,1222 P2.1@1735,1372 1844.67,1481.67 R11.2@1844.67,1501.06 1844.67,1556.67 1883,1595 2375,1595 2440,1530 C11.2@2440,1495 C10.2@2440,1400 2440,1350 2432,1342 2232.32,1342 4.3@2127.87,1237.55
  Bottom Layer w20: v1(-1530,230) -1431,230 v2@-1321,120 ; *4.20@-1259,419 -1259,221 v4(-1205,167)
  Bottom Layer w40: C1.1@-2185,441.46 -2169.46,457 *3.1@-2089.57,457 *3.1@-2085,457 ; v4(-2055,1677) -1963,1585 -1557,1585 v4(-1390,1752) ; Power1.5@982.84,-558 983.84,-557 1522,-557 1862,-217 1862,1245 P2.1@1735,1372 1705,1372 1655,1422 1655,1662 v2(1780,1787) v4(2185,1787)
5V_OUT: 1.4 C4.1 Fuse1.1 L1.2 | length 2318.6
  Top Layer w40: Fuse1.1@2282.39,1207 2394.39,1095 2598,1095 C4.1@2695,1192 2800,1087 2800,222 2752.22,174.22 L1.2@2752.22,-115 2586.93,50.29 1.4@2586.93,265.66
+5V: *2.8 *3.6 *4.24 *5.7 *6.7 C29.2 C32.2 C33.2 R32.1 R34.1 R36.1 R38.1 R41.1 R43.1 R48.1 R50.1 | length 6931
  Top Layer w20: v2(-1825,1247) -1794,1278 *6.7@-1732.51,1278 -1675,1278 -1632.46,1320.54 C33.2@-1632.46,1558 ; *5.7@-1732.51,1599 -1673.46,1599 ; C33.2@-1622.46,1548 C33.2@-1632.46,1558 ; -1673.46,1599 C33.2@-1632.46,1558 ; -1673.46,1599 -1657.46,1599 -1632.46,1574 C33.2@-1632.46,1558
  Top Layer w25: C29.2@-1940,-144.54 -2041.54,-43 *3.6@-2089.57,-43 -2112,-43 -2165,-96 -2165,-498 -2135,-528 -1945,-528 -1799,-382 -1799,23 -1729,93 -1444,93 -1225,312 v4(-1040,312) -950,312 -885,377 v4(-794.46,377)
  Bottom Layer w20: R34.1@-1866.46,1464 R38.1@-1866.46,1314 -1866.46,1247 ; R50.1@-1865,1014.54 R43.1@-1865,1164 -1866.46,1165.46 -1866.46,1247 ; v2(-1825,1247) -1866.46,1247 ; *2.8@-1374.49,858 -1310,922.49 -1075.49,922.49 -1060,907 -1000.38,907 -996.88,910.5 -996.5,910.5 -930,977 -815,977 -710,872 -710,612 -794.46,527.54 R32.1@-794.46,461.28
  Bottom Layer w25: *3.6@-2085,-53 -1947,85 -1947,700 -1920,727 -1853,727 -1737.5,842.5 -1737.5,927.5 -1765,955 -1853,955 -1864.46,966.46 R50.1@-1864.46,1014 ; *4.24@-1059,386.33 -1059,331 v4(-1040,312) ; R32.1@-794.46,461.28 v4(-794.46,377) -794.46,26.28 R48.1@-789.46,21.28
-5V: *2.4 *3.4 *5.4 *6.4 C31.1 C34.2 C35.2 | length 4558.3
  Top Layer w20: C34.2@-2027.54,1574 C35.2@-2027.54,1499 ; *6.4@-1921.49,1178 -2042,1178 -2146,1282 -2146,1359 -2027.54,1477.46 C35.2@-2027.54,1499 ; *5.4@-1921.49,1499 C35.2@-2027.54,1499
  Top Layer w25: v2@-2052,-342 v2(-2051,-343) C31.1@-1940,-343 ; v4(-1742,-344) -1742,-40 -1685,17 -1430,17 -1365,82 v2(-1365,112) ; v2(-1446,193) -1446,286 -1271,461 -1271,573 v2(-1280,582)
  Bottom Layer w25: -2260,157 *3.4@-2089.57,157 ; v4(-2045,1182) -2060,1182 -2260,982 -2260,-136 -2052,-344 v4(-1742,-344) ; v2(-1446,193) v2(-1365,112) ; v2(-1280,582) -1280,672 -1244,708 *2.4@-1185.51,708
  other v2: -2008,-343
ADC_A: R28.1 R29.2 STM1.29 | length 551.7
  Top Layer w10: v1(-950,827) -715,827 -677.17,864.83 STM1.29@-560.79,864.83
  Bottom Layer w15: R29.2@-1006.07,789 -988,789 v1(-950,827)
  Bottom Layer w25: R28.1@-1006.07,714 R29.2@-1006.07,789
ADC_IN1: *4.5 Signal1.7 | length 888.5
  Bottom Layer w10: *4.5@-1260,32 -1260,-28 -805,-483 Signal1.7@-805,-668.08
ADC_IN2: *4.4 Signal1.6 | length 912.9
  Bottom Layer w10: *4.4@-1210,32 -1210,-43 -696.3,-556.7 Signal1.6@-696.3,-668.08
ADC_IN3: *4.3 Signal1.5 | length 937.2
  Bottom Layer w10: *4.3@-1160,32 -1160,-48 -587.6,-620.4 Signal1.5@-587.6,-668.08
ADC_IN4: *4.2 Signal1.4 | length 967.9
  Bottom Layer w10: *4.2@-1110,32 -1110,-48 -489.92,-668.08 Signal1.4@-478.9,-668.08
AGND: 1.3 1.5 3.1 C3.2 D3.1 GND.1 | length 2883.8
  Top Layer w40: C3.2@1979,757 1979,648 2270,357 2520,357 ; D3.1@2096.61,2 2149.61,55 2434,55 ; 3.1@2157.4,-423 2243.4,-509 2564,-509 ; 1.5@2653.86,265.66 2653.86,333.14 2630,357 2520,357 ; GND.1@2709,-509 2564,-509 ; 2434,55 2520,141 1.3@2520,265.66 2520,357 ; 2434,55 2564,-75 2564,-509
BT0: R13.2 R25.1 STM1.94 | length 5098.9
  Top Layer w10: -1229,923.89 STM1.94@-1159.21,923.89 ; R25.1@403,-289 R25.1@408,-289
  Top Layer w15: v1(-1627,203) -1690,266 -1690,576 v1(-1552,714) ; v1(-1587,-58) -1587,-331 -1581,-337 -1877,-633 -1877,-798 -1789,-886 200,-886 450,-636 v1(450,-554) ; v1(-1517,839) -1492,864 -1466,864 -1420,910 -1265,910 -1251.11,923.89 -1229,923.89 ; R25.1@408,-289 v1(444,-325)
  Bottom Layer w10: -1609,106 -1585,82 -1585,-56 v1(-1587,-58)
  Bottom Layer w15: v1(-1627,203) -1627,124 -1609,106 ; v1(-1552,714) -1517,749 v1(-1517,839) ; 444,-548 v1(444,-325)
C3: *4.17 *6.6 | length 1606.7
  Top Layer w15: *6.6@-1732.51,1228 -1646,1228 -1600,1274 -1599,1273 v1(-1512,1273)
  Bottom Layer w15: v1(-1512,1273) -1512,921 -1583,850 -1583,658 -1706,535 -1706,377 -1633,304 -1441,304 -1410,335 *4.17@-1410,386.33
C3+: *6.3 Fuse2.2 P1.2 R10.1 | length 6334.9
  Top Layer w15: v1(-2030,1249) -2009,1228 *6.3@-1921.49,1228
  Top Layer w25: R10.1@1562,1041 1563,1042 P1.2@1736,1042 2013,1042 2177,878 2336,878 Fuse2.2@2455,997
  Bottom Layer w15: v1(-2030,1249) -2175,1394 -2175,1712 -1968,1919 1412,1919 1578,1753 1578,1200 P1.2@1736,1042
C5: *4.19 *5.6 | length 3323.7
  Top Layer w10: v1(-1885,767) -1779,767 -1778,768 -1742,732 -1742,571 -1773,540 v6(-1773,470) ; v1(-1815,1547) -1813,1549 *5.6@-1732.51,1549
  Bottom Layer w10: v1(-1885,767) -1895,767 -1945,817 -1945,920 -1907,958 -1907,1519 -1879,1547 v1(-1815,1547) ; v6(-1773,470) -1773,-67 -1682,-158 -1519,-158 -1485,-124 -1485,67.16 -1473.16,79 -1119,79 -1106,92 -1106,123 -1118,135 -1236,135 v1(-1284,183) -1310,209 *4.19@-1310,386.33
C5+: *5.3 Fuse1.2 P2.2 R8.1 | length 5495.6
  Top Layer w15: *5.3@-1921.49,1549 -1883,1549 -1840,1592 v1(-1840,1685) ; R8.1@1535,1499 v2(1535,1598)
  Top Layer w40: R8.1@1562,1472 P2.2@1735,1472 1778,1515 1778,1566 1862,1650 2398,1650 2499,1549 2499,1253.39 Fuse1.2@2467.61,1222
  Bottom Layer w15: v1(-1840,1685) -1840,1850 -1793,1897 1404.3,1897 1535,1766.3 v2(1535,1598)
C_ADC_IN1: *4.23 R45.2 | length 135.7
  Bottom Layer w15: *4.23@-1109,386.33 -1109,412 -1044,477 R45.2@-1044,495.07
C_ADC_IN2: *4.22 R46.2 | length 123.2
  Bottom Layer w15: *4.22@-1160,386.33 -1160,447 -1125,482 R46.2@-1125,495.07
C_ADC_IN3: *4.21 R47.2 | length 109.2
  Bottom Layer w15: R47.2@-1210,495.07 -1210,387.33 *4.21@-1209,386.33
CANH: CTM1.6 R2.2 Signal1.13 | length 858.8
  Top Layer w15: R2.2@-1507,-407.93 -1507,-618.28 Signal1.13@-1457.2,-668.08
  Bottom Layer w15: Signal1.13@-1457.2,-668.08 -1438,-648.87 CTM1.6@-1438,-98
CANL: CTM1.7 R2.1 Signal1.12 | length 669.7
  Top Layer w15: CTM1.7@-1538,-98 -1538,-310 R2.1@-1507,-341 -1471,-341 -1408,-404 -1408,-564 -1348.5,-623.5 Signal1.12@-1348.5,-668.08
CANRX: CTM1.4 STM1.70 | length 2033.8
  Top Layer w10: v1(-1483,629) -1477,623 -1477,480 -1443,446 -1381,446 -1329,498 CTM1.4@-1329,513 ; v1(-1020,1607) -997.8,1584.8 STM1.70@-997.8,1341.21
  Bottom Layer w10: v1(-1483,629) -1485,631 -1485,1547 -1425,1607 v1(-1020,1607)
CANTX: CTM1.3 STM1.71 | length 1702.3
  Top Layer w10: v1(-1448,589) -1448,532 CTM1.3@-1429,513 ; v1(-1100,1581) -1017.48,1498.48 STM1.71@-1017.48,1341.21
  Bottom Layer w10: v1(-1448,589) -1448,696 -1469,717 -1469,1538 -1426,1581 v1(-1100,1581)
CAP_IN0: CAP0.2 Signal1.25 | length 2678.7
  Bottom Layer w10: CAP0.2@-1662.75,1514 -1597,1514 -1538,1455 -1538,929 -1684,783 -1684,651 -1790.5,544.5 -1790.5,-129.5 -1515,-405 -1515,-718 -1453.11,-779.89 Signal1.25@-1402.85,-779.89
CAP_IN1: J4.2 Signal1.24 | length 2680.5
  Bottom Layer w10: J4.2@-1662.75,1364 -1614,1364 -1554,1304 -1554,935.63 -1700,789.63 -1700,657.63 -1806.5,551.13 -1806.5,-136.13 -1531,-411.63 -1531,-724.63 -1427.63,-828 -1342.26,-828 Signal1.24@-1294.15,-779.89
CAP_IN2: J6.2 Signal1.23 | length 2665.2
  Bottom Layer w10: J6.2@-1662.75,1214 -1615,1214 -1570,1169 -1570,942.25 -1716,796.25 -1716,664.25 -1822.5,557.75 -1822.5,-142.75 -1547,-418.25 -1547,-731.25 -1434.25,-844 -1249.56,-844 Signal1.23@-1185.45,-779.89
CAP_IN3: CAP3.2 Signal1.22 | length 2650.6
  Bottom Layer w10: CAP3.2@-1662.75,1064 -1614.54,1064 -1586,1035.46 -1586,948.88 -1732,802.88 -1732,670.88 -1838.5,564.38 -1838.5,-149.38 -1563,-424.88 -1563,-737.88 -1440.88,-860 -1156.86,-860 Signal1.22@-1076.75,-779.89
CAPTURE0: CAP0.4 R35.2 STM1.92 | length 950.5
  Top Layer w10: STM1.92@-1159.21,963.26 -1096.37,963.26 -1070,989.63 v1(-1070,1167)
  Bottom Layer w10: R35.2@-1270.46,1464 -1228.46,1422 -1106,1422 -982,1298 -982,1208 -1023,1167 v1(-1070,1167)
  Bottom Layer w15: CAP0.4@-1391.25,1464 R35.2@-1270.46,1464
CAPTURE1: J4.4 R39.2 STM1.93 | length 758.6
  Top Layer w10: STM1.93@-1159.21,943.57 -1083.43,943.57 -1040,987 -1040,1217 v1(-1065,1242)
  Bottom Layer w10: R39.2@-1270.46,1314 -1198.46,1242 v1(-1065,1242)
  Bottom Layer w15: J4.4@-1391.25,1314 R39.2@-1270.46,1314
CAPTURE2: J6.4 R44.2 STM1.95 | length 699.6
  Top Layer w10: STM1.95@-1159.21,904.2 -1092.8,904.2 -1010,987 v1(-1010,1092)
  Bottom Layer w10: R44.2@-1270.46,1164 -1198.46,1092 v1(-1010,1092)
  Bottom Layer w15: J6.4@-1391.25,1164 R44.2@-1270.46,1164
CAPTURE3: CAP3.4 R51.2 STM1.96 | length 582.1
  Top Layer w10: STM1.96@-1159.21,884.52 -1047.48,884.52 -1020,912 v1(-1020,942)
  Bottom Layer w10: CAP3.4@-1391.25,1014 CAP3.4@-1389.25,1014 ; R51.2@-1270.46,1014 -1223.46,967 -1045,967 v1(-1020,942)
  Bottom Layer w15: CAP3.4@-1389.25,1015 -1271.46,1015 R51.2@-1270.46,1014
CE: nRF1.2 STM1.57 | length 2465.9
  Top Layer w10: STM1.57@-741.89,1341.21 -741.89,1490.11 -661,1571 721,1571 1017,1275 v1(1019,1275) ; nRF1.2@1019,880 v1@1019,1001
  Bottom Layer w10: v1(1020,1003) v1@1020,1282
COM_A: *2.3 *4.1 R30.2 | length 1246.3
  Bottom Layer w10: *2.3@-1185.51,758 -1236,758 -1243,765 ; R30.2@-1074,860 -1111,897 -1235,897 -1250,882 -1250,772 -1243,765 ; *4.1@-1060,32 -1060,132 -1235,307 -1235,435 -1285,485 -1285,537 -1315,567 -1315,693 -1243,765
CSN: nRF1.3 STM1.56 | length 2421.3
  Top Layer w10: STM1.56@-722.2,1341.21 -722.2,1487.17 -654.37,1555 700,1555 v1(1067,1188) ; nRF1.3@1067,878 v1(1067,1001)
  Bottom Layer w10: v1@1067,1005 v1(1067,1188)
CTR_A: *4.10 STM1.97 | length 1285.6
  Top Layer w10: v1(-1609,237) -1671.5,299.5 -1671.5,559 -1530.5,700 -1342,700 -1290,752 -1290,832 -1257.17,864.83 STM1.97@-1159.21,864.83
  Bottom Layer w10: v1(-1609,237) -1599,237 -1510,148 *4.10@-1510,32
CTR_B: *4.11 STM1.98 | length 1201.8
  Top Layer w10: v1(-1556,156) -1540,156 -1482,214 -1482,290 -1556,364 -1556,445 -1577,466 -1577,618 -1511,684 -1333,684 -1274,743 -1274,823 -1251.85,845.15 STM1.98@-1159.21,845.15
  Bottom Layer w10: *4.11@-1560,56 -1560,152 v1(-1556,156)